# EAGLE board RGB_IR_J010131revC (EAGLE 7.7.0), part 1 of 5
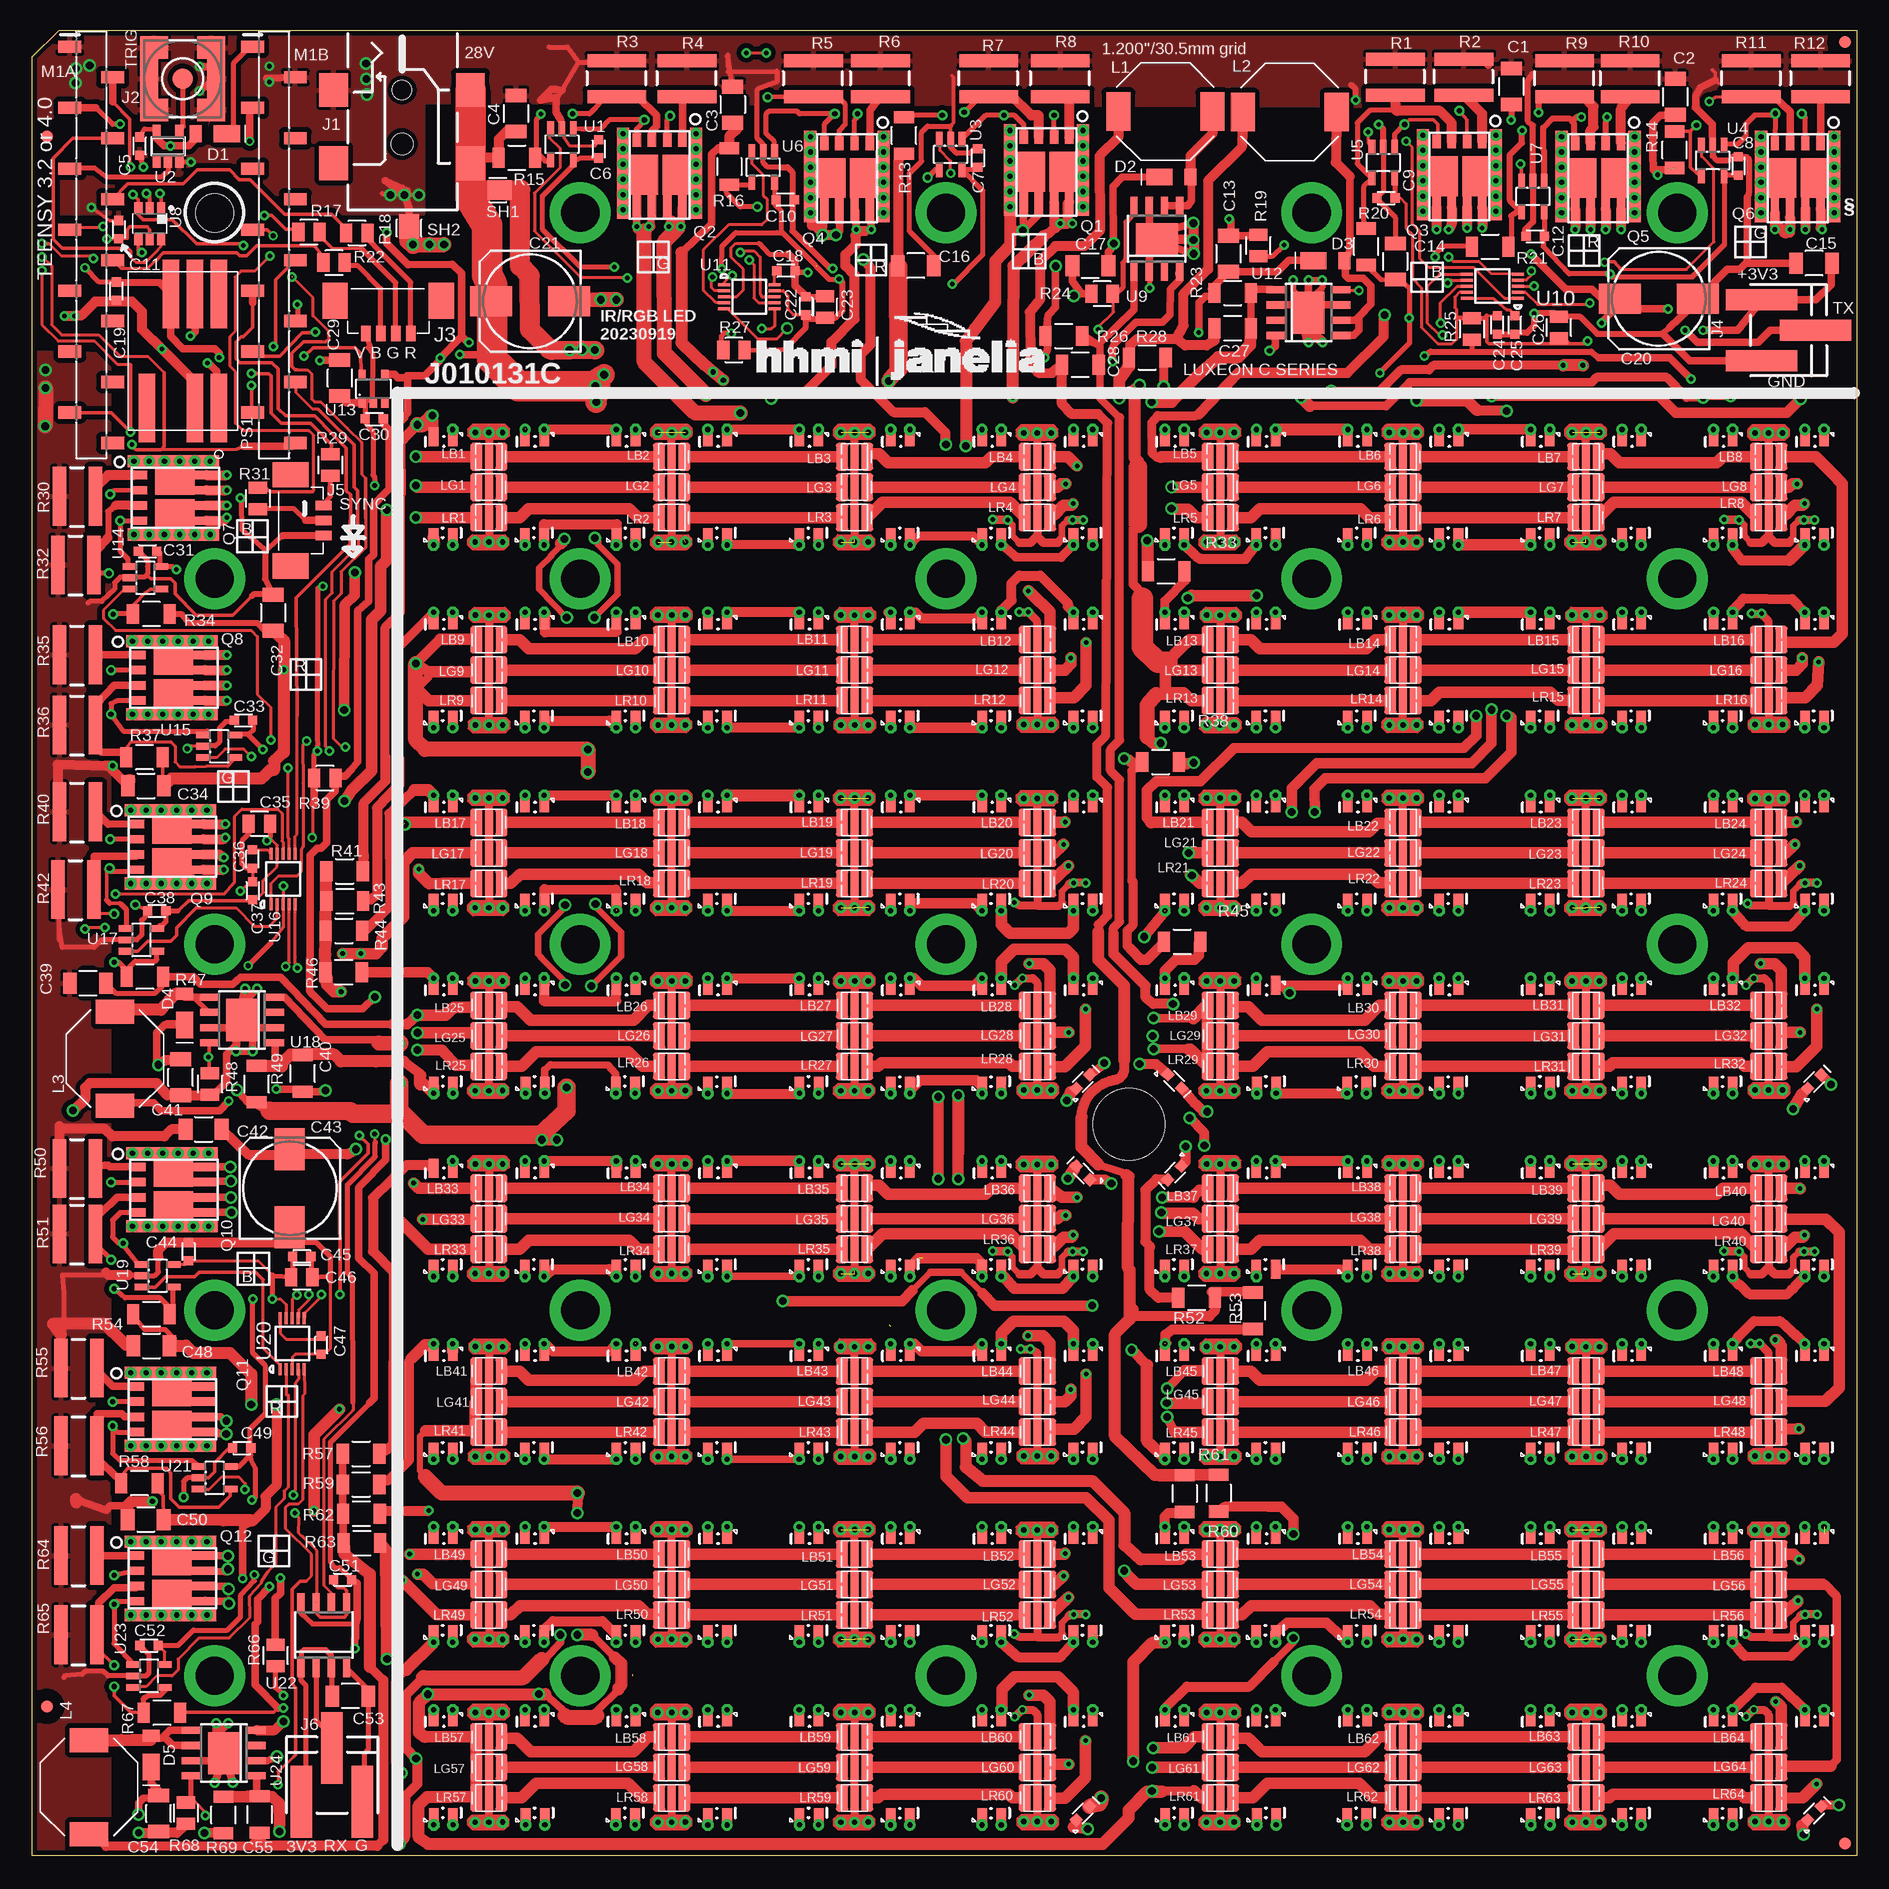
[diagram p0: board, top side]
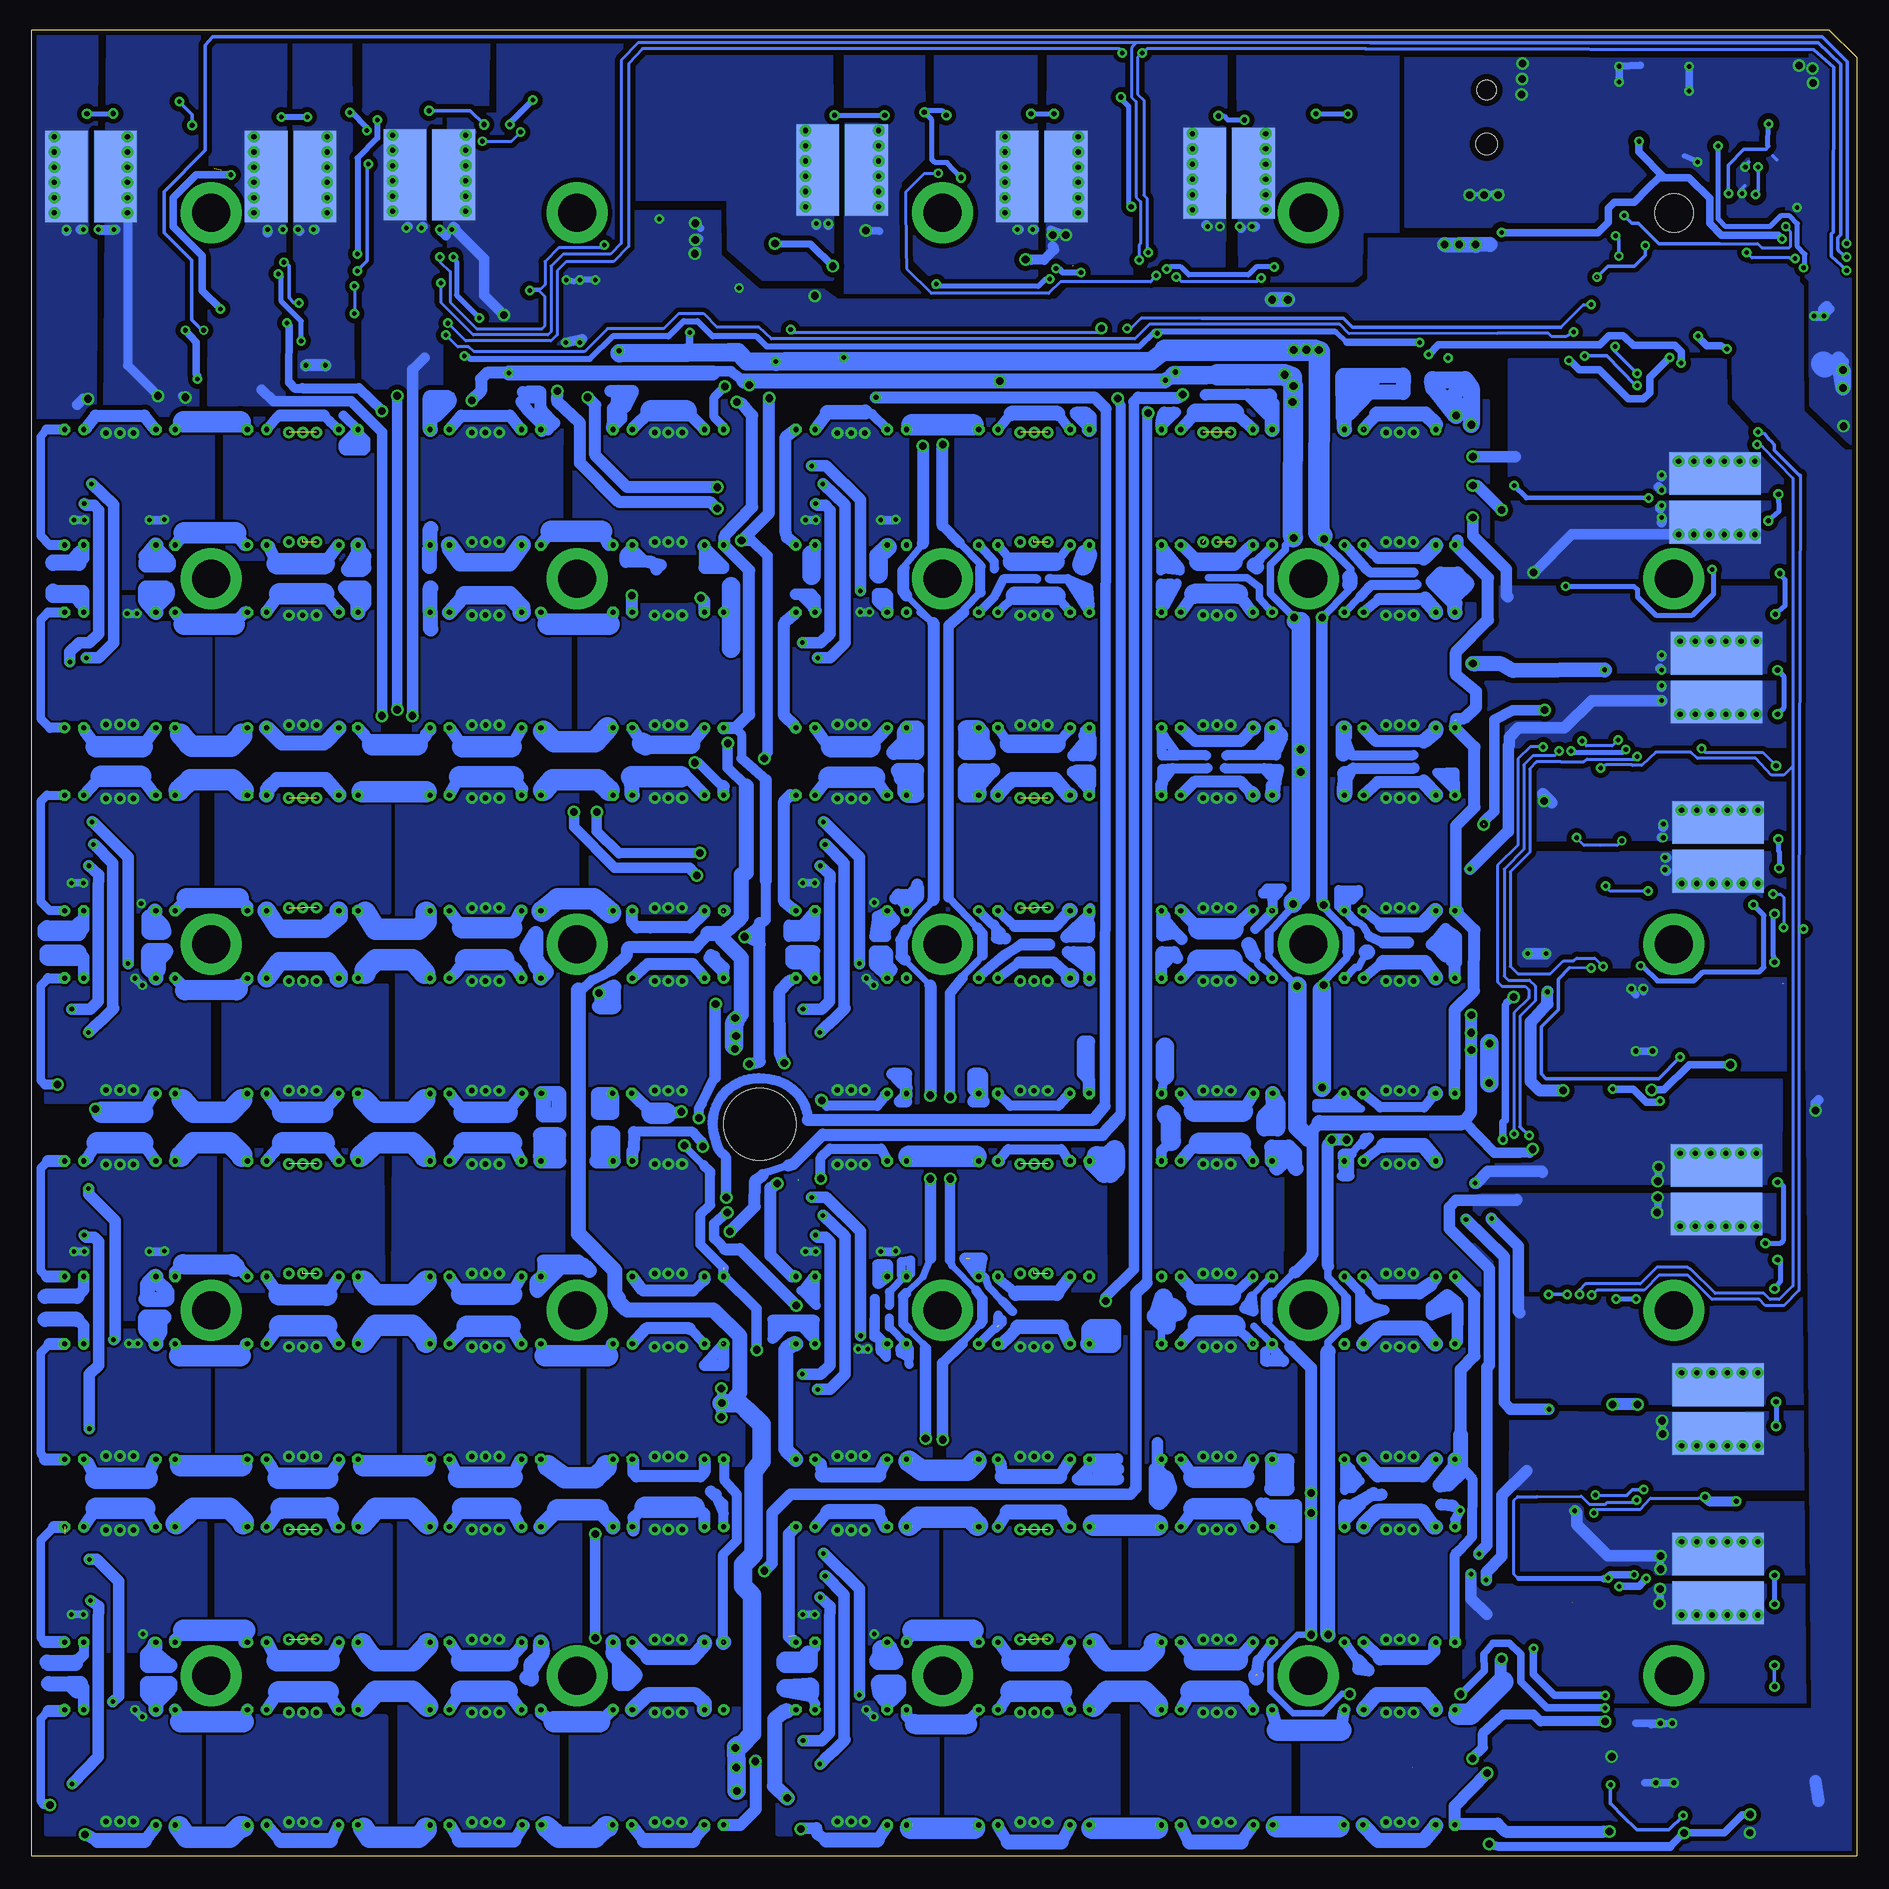
[diagram p1: board, bottom side, seen from below]

Size 152.15 x 152.15 mm. Coordinates in mm from the lower left corner, seen from the top.
Outline: 0,149.86 0,0 152.15,0 152.15,152.15 2.29,152.15 0,149.86
Copper layers (1*16): Top 0.068mm / dielectric 0.45mm / Bottom 0.068mm
Design rules "default *": minimum track width 8mil, minimum drill 12mil, track to track 8mil, track to pad 8mil, pad to pad 8mil, via to via 8mil, smd to smd 8mil, copper to edge 16mil, drill to drill 8mil, minimum pad ring 10mil, minimum via ring 8mil, stop-mask expansion 4mil, vias tented up to drill 25mil, thermal gap 10mil
Holes 5.99 mm at 91.44,60.96
Holes 3.17 mm at 15.24,136.91

## Footprints (pad centres in the part's own frame; a part is rotated, then mirrored left to right if it is on the bottom)
1210S = smd 1.14 x 1.75: 1 -1.5,0; 2 1.5,0
0603S = smd 0.762 x 0.762: 1 -0.762,0; 2 0.762,0
153CLV-0810 = smd 3.5 x 2.5: + 3.25,0; - -3.25,0
0805S = smd 1.016 x 1.524: 1 -0.889,0; 2 0.889,0
1206S = smd 1.016 x 1.651: 1 -1.524,0; 2 1.524,0
PWRDI-123 = smd 1 x 1.4: A 1.6,0 | smd 2.2 x 1.4: K -1,0
FIDUCIAL_1MM = smd 1 x 1: 1 0,0
LED_SFH4045_HEAT_A = smd 0.8 x 1.6: A -0.8,-0.4; C 0.8,-0.4 | drill 0.432 octagon: A1 -0.8,-1
LED_SFH4050_HEAT = smd 0.8 x 1.6: A -0.8,-0.4; C 0.8,-0.4 | drill 0.432 octagon: A1 -0.8,-1 | drill 0.432: C1 0.8,-1
LED_SFH4050_HEAT_C = smd 0.8 x 1.6: A -0.8,-0.4; C 0.8,-0.4 | drill 0.432: C1 0.8,-1
LED_SFH4050 = smd 0.8 x 0.8: A -0.8,0; C 0.8,0
PJ-002 = smd 2.8 x 2.4: 1A 5,5.7; 1B 11.1,5.7; 2 5,-5.7; 3 11.1,-5.7 | hole 1.6: 5,0 | hole 1.8: 9.5,0
SMA-SMD = smd 1.73 x 1.73: 1 0,0 | smd 2.35 x 1.9: 2@1 -2.375,2.6; 2@2 -2.375,-2.6; 2@3 2.375,-2.6; 2@4 2.375,2.6 | smd 1.5 x 3.4: 2@5 -2.8,0; 2@6 2.8,0
MOLEX_1.25-4 = smd 0.8 x 1.3: 1 -1.875,1.25; 2 -0.625,1.25; 3 0.625,1.25; 4 1.875,1.25 | smd 2.1 x 3: P$3 -4.425,-1.5; P$4 4.425,-1.5
TE-3-SM-V = smd 1.778 x 5.969: P$1 2.54,-2.235; P$2 0,2.235; P$3 -2.54,-2.235
MOLEX_1.25-3 = smd 0.8 x 1.3: 1 -1.25,1.875; 2 0,1.875; 3 1.25,1.875 | smd 2.1 x 3: P$3 -3.8,-0.875; P$4 3.8,-0.875
SRU8043 = smd 2.007 x 3.2: 1 -3.912,0; 2 3.912,0
SUNPLUS-LED = smd 1 x 2.286: GA -1.05,0; GC 1.05,0 | smd 0.69 x 2.286: T 0,0
SAMTEC_SSM-114-S-SV = smd 1.016 x 1.905: 1 0,0; 2 2.54,3.556; 3 5.08,0; 4 7.62,3.556; 5 10.16,0; 6 12.7,3.556; 7 15.24,0; 8 17.78,3.556; 9 20.32,0; 10 22.86,3.556; 11 25.4,0; 12 27.94,3.556; 13 30.48,0; 14 33.02,3.556
DC-DC-TDN-5W = smd 5.7 x 1.4: 1 4.75,3; 2 4.75,1; 4 4.75,-3; 5 -4.75,3; 6 -4.75,1; 7 -4.75,-1
LFPAK56_HS2 = smd 0.7 x 1.15: 1 -1.905,-3.275; 2 -0.635,-3.275; 3 0.635,-3.275; 4 1.905,-3.275 | smd 0.7 x 1.9: 5 1.905,2.225; 6 0.635,2.225; 7 -0.635,2.225; 8 -1.905,2.225 | drill 0.432: 5A 3.048,1.27; 5A1 3.048,2.54; 5B 3.048,0; 5C 3.048,-1.27; 5C1 3.048,-2.54; 5C2 3.048,-3.81; 8A -3.048,1.27; 8B -3.048,0; 8C -3.048,-1.27; 8C1 -3.048,-2.54; 8C2 -3.048,2.54; 8C3 -3.048,-3.81 | smd 2.286 x 3.302: 56 1.27,-0.381; 78 -1.397,-0.381 | smd 1.016 x 7.62: 56A 3.048,-0.508; 78A -3.048,-0.508 | smd 3.556 x 7.62 bottom: 56B 2.032,-0.508; 78B -2.032,-0.508
1812 = smd 4.9 x 1.1: 1 0,1.5; 2 0,-1.5
JUMPER = smd 1.016 x 1.651: 1 -0.635,0; 2 0.381,0
SOT23-5 = smd 0.55 x 1.2: 1 -0.95,-1.3; 2 0,-1.3; 3 0.95,-1.3; 4 0.95,1.3; 5 -0.95,1.3
SOT23-5' = smd 0.69 x 0.99: 1 -0.95,-1.29; 2 0,-1.29; 3 0.95,-1.29; 4 0.95,1.3; 5 -0.95,1.3
DBV_R-PDSO-G6 = smd 0.69 x 0.99: 1 -0.95,-1.29; 2 0,-1.29; 3 0.95,-1.29; 4 0.95,1.3; 5 0,1.3; 6 -0.95,1.3
SOIC8-EP = smd 0.6 x 1.5: 1 -1.905,-2.75; 2 -0.635,-2.75; 3 0.635,-2.75; 4 1.905,-2.75; 5 1.905,2.75; 6 0.635,2.75; 7 -0.635,2.75; 8 -1.905,2.75 | smd 3.502 x 2.613: EP 0,0
MSOP10 = smd 0.25 x 1: 1 -1,-2.113; 2 -0.5,-2.113; 3 0,-2.113; 4 0.5,-2.113; 5 1,-2.113; 6 1,2.113; 7 0.5,2.113; 8 0,2.113; 9 -0.5,2.113; 10 -1,2.113
SOT23-5'' = smd 0.6 x 0.9: 1 -0.95,-1.15; 2 0,-1.15; 3 0.95,-1.15; 4 0.95,1.15; 5 -0.95,1.15
SOIC8 = smd 0.6 x 1.5: 1 -1.905,-2.75; 2 -0.635,-2.75; 3 0.635,-2.75; 4 1.905,-2.75; 5 1.905,2.75; 6 0.635,2.75; 7 -0.635,2.75; 8 -1.905,2.75
SUNPLUS-VIAS-ONLY = drill 0.457: T1 -1.143,4.572; T2 0,4.572; T3 1.143,4.572; T4 1.143,-4.572 | drill 0.432: T5 0,-4.572; T6 -1.143,-4.572
SUNPLUS-TOP-VIAS-ONLY = drill 0.457: T1 -1.143,4.521; T2 0,4.521; T3 1.143,4.521

## Placement (x,y rotation side)
C1  10@50  [1210S]  123.32,147.45 90 top
C2  10@50  [1210S]  136.98,146.58 90 top
C3  10@50  [1210S]  58.42,145.92 90 top
C4  10@50  [1210S]  40.36,145.19 90 top
C5  0.1  [0603S]  8.99,142.47 270 top
C6  0.1  [0603S]  47.24,142.24 90 top
C7  0.1  [0603S]  78.84,141.48 90 top
C8  0.1  [0603S]  142.24,140.82 90 top
C9  0.1  [0603S]  112.88,138.15 180 top
C10  0.1  [0603S]  62.79,138 0 top
C11  0.1  [0603S]  7.24,135.51 90 top
C12  0.1  [0603S]  125.32,134.95 180 top
C13  10@50  [1210S]  99.75,133.5 90 top
C14  10@50  [1210S]  113.64,132.87 90 top
C15  10  [1210S]  148.56,132.72 0 top
C16  10@50  [1210S]  73.69,132.51 0 top
C17  10@50  [1210S]  88.24,132.51 180 top
C18  0.1  [0603S]  62.87,132.08 0 top
C19  0.1  [0603S]  7.06,130.38 270 top
C20  [153CLV-0810]  135.61,129.74 180 top
C21  [153CLV-0810]  41.53,129.54 180 top
C22  0.1  [0603S]  64.52,129.16 90 top
C23  4.7  [0805S]  66.12,129.06 90 top
C24  0.1  [0603S]  122.15,127.56 270 top
C25  0.1  [0603S]  123.62,127.56 270 top
C26  4.7  [0805S]  127.28,127.36 90 top
C27  2.2@50  [1206S]  100.1,127.3 180 top
C28  2.2@50  [1206S]  87.4,124.26 180 top
C29  10  [1210S]  25.68,123.14 270 top
C30  0.1  [0603S]  28.55,119.74 180 top
C31  0.1  [0603S]  9.65,108.71 180 top
C32  10@50  [1210S]  20.12,103.58 90 top
C33  0.1  [0603S]  17.65,94.61 180 top
C34  10@50  [1210S]  9.53,89.15 180 top
C35  4.7  [0805S]  18.97,86 180 top
C36  0.1  [0603S]  18.39,83.06 270 top
C37  0.1  [0603S]  18.41,80.42 90 top
C38  0.1  [0603S]  10.41,78.74 180 top
C39  10@50  [1210S]  4.67,72.72 180 top
C40  2.2@50  [1206S]  22.58,65.2 270 top
C41  10@50  [1210S]  12.4,64.87 270 top
C42  10@50  [1210S]  14.33,60.53 180 top
C43  [153CLV-0810]  21.51,55.63 90 top
C44  0.1  [0603S]  13.06,50.34 90 top
C45  0.1  [0603S]  22.5,49.94 0 top
C46  4.7  [0805S]  22.5,48.21 0 top
C47  0.1  [0603S]  24.13,42.55 270 top
C48  10@50  [1210S]  9.98,42.49 180 top
C49  0.1  [0603S]  17.5,33.99 180 top
C50  10@50  [1210S]  9.5,28.02 180 top
C51  0.1  [0603S]  25.91,23.01 180 top
C52  0.1  [0603S]  9.78,17.53 180 top
C53  10  [1210S]  26.54,13.31 0 top
C54  10@50  [1210S]  10.57,3.53 270 top
C55  2.2@50  [1206S]  19,3.43 270 top
D1  DLFS240L  [PWRDI-123]  15.27,143.51 180 top
D2  DLFS240L  [PWRDI-123]  95,139.9 0 top
D3  DLFS240L  [PWRDI-123]  107.82,132.92 0 top
D4  DLFS240L  [PWRDI-123]  12.75,70.23 90 top
D5  DLFS240L  [PWRDI-123]  9.96,8.38 90 top
FID1  FIDUCIAL  [FIDUCIAL_1MM]  151.13,151.13 0 top
FID2  FIDUCIAL  [FIDUCIAL_1MM]  1.27,143.26 0 top
FID3  FIDUCIAL  [FIDUCIAL_1MM]  1.27,12.45 0 top
FID4  FIDUCIAL  [FIDUCIAL_1MM]  151.13,1.02 0 top
IR1  SFH4050  [LED_SFH4045_HEAT_A]  34.29,117.86 180 top
IR2  SFH4050  [LED_SFH4050_HEAT]  41.91,117.86 180 top
IR3  SFH4050  [LED_SFH4050_HEAT]  49.53,117.86 180 top
IR4  SFH4050  [LED_SFH4050_HEAT]  57.15,117.86 180 top
IR5  SFH4050  [LED_SFH4050_HEAT]  64.77,117.86 180 top
IR6  SFH4050  [LED_SFH4050_HEAT]  72.39,117.86 180 top
IR7  SFH4050  [LED_SFH4050_HEAT]  80.01,117.86 180 top
IR8  SFH4050  [LED_SFH4050_HEAT]  87.63,117.86 180 top
IR9  SFH4050  [LED_SFH4050_HEAT]  95.25,117.86 180 top
IR10  SFH4050  [LED_SFH4050_HEAT]  102.87,117.86 180 top
IR11  SFH4050  [LED_SFH4050_HEAT]  110.49,117.86 180 top
IR12  SFH4050  [LED_SFH4050_HEAT]  118.11,117.86 180 top
IR13  SFH4050  [LED_SFH4050_HEAT]  125.73,117.86 180 top
IR14  SFH4050  [LED_SFH4050_HEAT]  133.35,117.86 180 top
IR15  SFH4050  [LED_SFH4050_HEAT]  140.97,117.86 180 top
IR16  SFH4050  [LED_SFH4050_HEAT]  148.59,117.86 180 top
IR17  SFH4050  [LED_SFH4050_HEAT]  34.29,110.24 0 top
IR18  SFH4050  [LED_SFH4050_HEAT]  41.91,110.24 0 top
IR19  SFH4050  [LED_SFH4050_HEAT]  49.53,110.24 0 top
IR20  SFH4050  [LED_SFH4050_HEAT]  57.15,110.24 0 top
IR21  SFH4050  [LED_SFH4050_HEAT]  64.77,110.24 0 top
IR22  SFH4050  [LED_SFH4050_HEAT]  72.39,110.24 0 top
IR23  SFH4050  [LED_SFH4050_HEAT]  80.01,110.24 0 top
IR24  SFH4050  [LED_SFH4050_HEAT]  87.63,110.24 0 top
IR25  SFH4050  [LED_SFH4050_HEAT]  95.25,110.24 0 top
IR26  SFH4050  [LED_SFH4050_HEAT]  102.87,110.24 0 top
IR27  SFH4050  [LED_SFH4050_HEAT]  110.49,110.24 0 top
IR28  SFH4050  [LED_SFH4050_HEAT]  118.11,110.24 0 top
IR29  SFH4050  [LED_SFH4050_HEAT]  125.73,110.24 0 top
IR30  SFH4050  [LED_SFH4050_HEAT]  133.35,110.24 0 top
IR31  SFH4050  [LED_SFH4050_HEAT]  140.97,110.24 0 top
IR32  SFH4050  [LED_SFH4050_HEAT]  148.59,110.24 0 top
IR33  SFH4050  [LED_SFH4050_HEAT]  34.29,102.62 180 top
IR34  SFH4050  [LED_SFH4050_HEAT]  41.91,102.62 180 top
IR35  SFH4050  [LED_SFH4050_HEAT]  49.53,102.62 180 top
IR36  SFH4050  [LED_SFH4050_HEAT]  57.15,102.62 180 top
IR37  SFH4050  [LED_SFH4050_HEAT]  64.77,102.62 180 top
IR38  SFH4050  [LED_SFH4050_HEAT]  72.39,102.62 180 top
IR39  SFH4050  [LED_SFH4050_HEAT]  80.01,102.62 180 top
IR40  SFH4050  [LED_SFH4050_HEAT]  87.63,102.62 180 top
IR41  SFH4050  [LED_SFH4050_HEAT]  95.25,102.62 180 top
IR42  SFH4050  [LED_SFH4050_HEAT]  102.87,102.62 180 top
IR43  SFH4050  [LED_SFH4050_HEAT]  110.49,102.62 180 top
IR44  SFH4050  [LED_SFH4050_HEAT]  118.11,102.62 180 top
IR45  SFH4050  [LED_SFH4050_HEAT]  125.73,102.62 180 top
IR46  SFH4050  [LED_SFH4050_HEAT]  133.35,102.62 180 top
IR47  SFH4050  [LED_SFH4050_HEAT]  140.97,102.62 180 top
IR48  SFH4050  [LED_SFH4050_HEAT]  148.59,102.62 180 top
IR49  SFH4050  [LED_SFH4050_HEAT]  34.29,95 0 top
IR50  SFH4050  [LED_SFH4050_HEAT]  41.91,95 0 top
IR51  SFH4050  [LED_SFH4050_HEAT]  49.53,95 0 top
IR52  SFH4050  [LED_SFH4050_HEAT]  57.15,95 0 top
IR53  SFH4050  [LED_SFH4050_HEAT]  64.77,95 0 top
IR54  SFH4050  [LED_SFH4050_HEAT]  72.39,95 0 top
IR55  SFH4050  [LED_SFH4050_HEAT]  80.01,95 0 top
IR56  SFH4050  [LED_SFH4050_HEAT]  87.63,95 0 top
IR57  SFH4050  [LED_SFH4050_HEAT]  95.25,95 0 top
IR58  SFH4050  [LED_SFH4050_HEAT]  102.87,95 0 top
IR59  SFH4050  [LED_SFH4050_HEAT]  110.49,95 0 top
IR60  SFH4050  [LED_SFH4050_HEAT]  118.11,95 0 top
IR61  SFH4050  [LED_SFH4050_HEAT]  125.73,95 0 top
IR62  SFH4050  [LED_SFH4050_HEAT]  133.35,95 0 top
IR63  SFH4050  [LED_SFH4050_HEAT]  140.97,95 0 top
IR64  SFH4050  [LED_SFH4050_HEAT]  148.59,95 0 top
IR65  SFH4050  [LED_SFH4050_HEAT]  34.29,87.38 180 top
IR66  SFH4050  [LED_SFH4050_HEAT]  41.91,87.38 180 top
IR67  SFH4050  [LED_SFH4050_HEAT]  49.53,87.38 180 top
IR68  SFH4050  [LED_SFH4050_HEAT]  57.15,87.38 180 top
IR69  SFH4050  [LED_SFH4050_HEAT]  64.77,87.38 180 top
IR70  SFH4050  [LED_SFH4050_HEAT]  72.39,87.38 180 top
IR71  SFH4050  [LED_SFH4050_HEAT]  80.01,87.38 180 top
IR72  SFH4050  [LED_SFH4050_HEAT]  87.63,87.38 180 top
IR73  SFH4050  [LED_SFH4050_HEAT]  95.25,87.38 180 top
IR74  SFH4050  [LED_SFH4050_HEAT]  102.87,87.38 180 top
IR75  SFH4050  [LED_SFH4050_HEAT]  110.49,87.38 180 top
IR76  SFH4050  [LED_SFH4050_HEAT]  118.11,87.38 180 top
IR77  SFH4050  [LED_SFH4050_HEAT]  125.73,87.38 180 top
IR78  SFH4050  [LED_SFH4050_HEAT]  133.35,87.38 180 top
IR79  SFH4050  [LED_SFH4050_HEAT]  140.97,87.38 180 top
IR80  SFH4050  [LED_SFH4050_HEAT]  148.59,87.38 180 top
IR81  SFH4050  [LED_SFH4050_HEAT]  34.29,79.76 0 top
IR82  SFH4050  [LED_SFH4050_HEAT]  41.91,79.76 0 top
IR83  SFH4050  [LED_SFH4050_HEAT]  49.53,79.76 0 top
IR84  SFH4050  [LED_SFH4050_HEAT]  57.15,79.76 0 top
IR85  SFH4050  [LED_SFH4050_HEAT]  64.77,79.76 0 top
IR86  SFH4050  [LED_SFH4050_HEAT]  72.39,79.76 0 top
IR87  SFH4050  [LED_SFH4050_HEAT]  80.01,79.76 0 top
IR88  SFH4050  [LED_SFH4050_HEAT]  87.63,79.76 0 top
IR89  SFH4050  [LED_SFH4050_HEAT]  95.25,79.76 0 top
IR90  SFH4050  [LED_SFH4050_HEAT]  102.87,79.76 0 top
IR91  SFH4050  [LED_SFH4050_HEAT]  110.49,79.76 0 top
IR92  SFH4050  [LED_SFH4050_HEAT]  118.11,79.76 0 top
IR93  SFH4050  [LED_SFH4050_HEAT]  125.73,79.76 0 top
IR94  SFH4050  [LED_SFH4050_HEAT]  133.35,79.76 0 top
IR95  SFH4050  [LED_SFH4050_HEAT]  140.97,79.76 0 top
IR96  SFH4050  [LED_SFH4050_HEAT]  148.59,79.76 0 top
IR97  SFH4050  [LED_SFH4050_HEAT]  34.29,72.14 180 top
IR98  SFH4050  [LED_SFH4050_HEAT]  41.91,72.14 180 top
IR99  SFH4050  [LED_SFH4050_HEAT]  49.53,72.14 180 top
IR100  SFH4050  [LED_SFH4050_HEAT]  57.15,72.14 180 top
IR101  SFH4050  [LED_SFH4050_HEAT]  64.77,72.14 180 top
IR102  SFH4050  [LED_SFH4050_HEAT]  72.39,72.14 180 top
IR103  SFH4050  [LED_SFH4050_HEAT]  80.01,72.14 180 top
IR104  SFH4050  [LED_SFH4050_HEAT]  87.63,72.14 180 top
IR105  SFH4050  [LED_SFH4050_HEAT]  95.25,72.14 180 top
IR106  SFH4050  [LED_SFH4050_HEAT_C]  102.87,72.14 180 top
IR107  SFH4050  [LED_SFH4050_HEAT]  110.49,72.14 180 top
IR108  SFH4050  [LED_SFH4050_HEAT]  118.11,72.14 180 top
IR109  SFH4050  [LED_SFH4050_HEAT]  125.73,72.14 180 top
IR110  SFH4050  [LED_SFH4050_HEAT]  133.35,72.14 180 top
IR111  SFH4050  [LED_SFH4050_HEAT]  140.97,72.14 180 top
IR112  SFH4050  [LED_SFH4050_HEAT]  148.59,72.14 180 top
IR113  SFH4050  [LED_SFH4050_HEAT]  34.31,64.53 0 top
IR114  SFH4050  [LED_SFH4050_HEAT]  41.96,64.53 0 top
IR115  SFH4050  [LED_SFH4050_HEAT]  49.48,64.53 0 top
IR116  SFH4050  [LED_SFH4050_HEAT]  64.79,64.53 0 top
IR117  SFH4050  [LED_SFH4050]  95.27,64.53 315 top
IR118  SFH4050  [LED_SFH4050_HEAT]  102.92,64.53 0 top
IR119  SFH4050  [LED_SFH4050_HEAT]  110.44,64.53 0 top
IR120  SFH4050  [LED_SFH4050_HEAT]  125.75,64.53 0 top
IR121  SFH4050  [LED_SFH4050_HEAT]  57.15,64.52 0 top
IR122  SFH4050  [LED_SFH4050_HEAT]  72.39,64.52 0 top
IR123  SFH4050  [LED_SFH4050_HEAT]  80.01,64.52 0 top
IR124  SFH4050  [LED_SFH4050]  87.63,64.52 45 top
IR125  SFH4050  [LED_SFH4050_HEAT]  118.11,64.52 0 top
IR126  SFH4050  [LED_SFH4050_HEAT]  133.35,64.52 0 top
IR127  SFH4050  [LED_SFH4050_HEAT]  140.97,64.52 0 top
IR128  SFH4050  [LED_SFH4050]  148.59,64.52 45 top
IR129  SFH4050  [LED_SFH4045_HEAT_A]  34.29,56.9 180 top
IR130  SFH4050  [LED_SFH4050_HEAT]  41.91,56.9 180 top
IR131  SFH4050  [LED_SFH4050_HEAT]  49.53,56.9 180 top
IR132  SFH4050  [LED_SFH4050_HEAT]  57.15,56.9 180 top
IR133  SFH4050  [LED_SFH4050_HEAT]  64.77,56.9 180 top
IR134  SFH4050  [LED_SFH4050_HEAT]  72.39,56.9 180 top
IR135  SFH4050  [LED_SFH4050_HEAT]  80.01,56.9 180 top
IR136  SFH4050  [LED_SFH4050]  87.63,56.9 135 top
IR137  SFH4050  [LED_SFH4050]  95.25,56.9 225 top
IR138  SFH4050  [LED_SFH4050_HEAT]  102.87,56.9 180 top
IR139  SFH4050  [LED_SFH4050_HEAT]  110.49,56.9 180 top
IR140  SFH4050  [LED_SFH4050_HEAT]  118.11,56.9 180 top
IR141  SFH4050  [LED_SFH4050_HEAT]  125.73,56.9 180 top
IR142  SFH4050  [LED_SFH4050_HEAT]  133.35,56.9 180 top
IR143  SFH4050  [LED_SFH4050_HEAT]  140.97,56.9 180 top
IR144  SFH4050  [LED_SFH4050_HEAT]  148.59,56.9 180 top
IR145  SFH4050  [LED_SFH4050_HEAT]  34.29,49.28 0 top
IR146  SFH4050  [LED_SFH4050_HEAT]  41.91,49.28 0 top
IR147  SFH4050  [LED_SFH4050_HEAT]  49.53,49.28 0 top
IR148  SFH4050  [LED_SFH4050_HEAT]  57.15,49.28 0 top
IR149  SFH4050  [LED_SFH4050_HEAT]  64.77,49.28 0 top
IR150  SFH4050  [LED_SFH4050_HEAT]  72.39,49.28 0 top
IR151  SFH4050  [LED_SFH4050_HEAT]  80.01,49.28 0 top
IR152  SFH4050  [LED_SFH4050_HEAT]  87.63,49.28 0 top
IR153  SFH4050  [LED_SFH4050_HEAT]  95.25,49.28 0 top
IR154  SFH4050  [LED_SFH4045_HEAT_A]  102.87,49.28 0 top
IR155  SFH4050  [LED_SFH4050_HEAT]  110.49,49.28 0 top
IR156  SFH4050  [LED_SFH4050_HEAT]  118.11,49.28 0 top
IR157  SFH4050  [LED_SFH4050_HEAT]  125.73,49.28 0 top
IR158  SFH4050  [LED_SFH4050_HEAT]  133.35,49.28 0 top
IR159  SFH4050  [LED_SFH4050_HEAT]  140.97,49.28 0 top
IR160  SFH4050  [LED_SFH4050_HEAT]  148.59,49.28 0 top
IR161  SFH4050  [LED_SFH4050_HEAT]  34.29,41.66 180 top
IR162  SFH4050  [LED_SFH4050_HEAT]  41.91,41.66 180 top
IR163  SFH4050  [LED_SFH4050_HEAT]  49.53,41.66 180 top
IR164  SFH4050  [LED_SFH4050_HEAT]  57.15,41.66 180 top
IR165  SFH4050  [LED_SFH4050_HEAT]  64.77,41.66 180 top
IR166  SFH4050  [LED_SFH4050_HEAT]  72.39,41.66 180 top
IR167  SFH4050  [LED_SFH4050_HEAT]  80.01,41.66 180 top
IR168  SFH4050  [LED_SFH4050_HEAT]  87.63,41.66 180 top
IR169  SFH4050  [LED_SFH4050_HEAT]  95.25,41.66 180 top
IR170  SFH4050  [LED_SFH4050_HEAT]  102.87,41.66 180 top
IR171  SFH4050  [LED_SFH4050_HEAT]  110.49,41.66 180 top
IR172  SFH4050  [LED_SFH4050_HEAT]  118.11,41.66 180 top
IR173  SFH4050  [LED_SFH4050_HEAT]  125.73,41.66 180 top
IR174  SFH4050  [LED_SFH4050_HEAT]  133.35,41.66 180 top
IR175  SFH4050  [LED_SFH4050_HEAT]  140.97,41.66 180 top
IR176  SFH4050  [LED_SFH4050_HEAT]  148.59,41.66 180 top
IR177  SFH4050  [LED_SFH4050_HEAT]  34.29,34.04 0 top
IR178  SFH4050  [LED_SFH4050_HEAT]  41.91,34.04 0 top
IR179  SFH4050  [LED_SFH4050_HEAT]  49.53,34.04 0 top
IR180  SFH4050  [LED_SFH4050_HEAT]  57.15,34.04 0 top
IR181  SFH4050  [LED_SFH4050_HEAT]  64.77,34.04 0 top
IR182  SFH4050  [LED_SFH4050_HEAT]  72.39,34.04 0 top
IR183  SFH4050  [LED_SFH4050_HEAT]  80.01,34.04 0 top
IR184  SFH4050  [LED_SFH4050_HEAT]  87.63,34.04 0 top
IR185  SFH4050  [LED_SFH4050_HEAT]  95.25,34.04 0 top
IR186  SFH4050  [LED_SFH4050_HEAT]  102.87,34.04 0 top
IR187  SFH4050  [LED_SFH4050_HEAT]  110.49,34.04 0 top
IR188  SFH4050  [LED_SFH4050_HEAT]  118.11,34.04 0 top
IR189  SFH4050  [LED_SFH4050_HEAT]  125.73,34.04 0 top
IR190  SFH4050  [LED_SFH4050_HEAT]  133.35,34.04 0 top
IR191  SFH4050  [LED_SFH4050_HEAT]  140.97,34.04 0 top
IR192  SFH4050  [LED_SFH4050_HEAT]  148.59,34.04 0 top
IR193  SFH4050  [LED_SFH4050_HEAT]  34.29,26.42 180 top
IR194  SFH4050  [LED_SFH4050_HEAT]  41.91,26.42 180 top
IR195  SFH4050  [LED_SFH4050_HEAT]  49.53,26.42 180 top
IR196  SFH4050  [LED_SFH4050_HEAT]  57.15,26.42 180 top
IR197  SFH4050  [LED_SFH4050_HEAT]  64.77,26.42 180 top
IR198  SFH4050  [LED_SFH4050_HEAT]  72.39,26.42 180 top
IR199  SFH4050  [LED_SFH4050_HEAT]  80.01,26.42 180 top
IR200  SFH4050  [LED_SFH4050_HEAT]  87.63,26.42 180 top
IR201  SFH4050  [LED_SFH4050_HEAT]  95.25,26.42 180 top
IR202  SFH4050  [LED_SFH4050_HEAT]  102.87,26.42 180 top
IR203  SFH4050  [LED_SFH4050_HEAT]  110.49,26.42 180 top
IR204  SFH4050  [LED_SFH4050_HEAT]  118.11,26.42 180 top
IR205  SFH4050  [LED_SFH4050_HEAT]  125.73,26.42 180 top
IR206  SFH4050  [LED_SFH4050_HEAT]  133.35,26.42 180 top
IR207  SFH4050  [LED_SFH4050_HEAT]  140.97,26.42 180 top
IR208  SFH4050  [LED_SFH4050_HEAT]  148.59,26.42 180 top
IR209  SFH4050  [LED_SFH4050_HEAT]  34.29,18.8 0 top
IR210  SFH4050  [LED_SFH4050_HEAT]  41.91,18.8 0 top
IR211  SFH4050  [LED_SFH4050_HEAT]  49.53,18.8 0 top
IR212  SFH4050  [LED_SFH4050_HEAT]  57.15,18.8 0 top
IR213  SFH4050  [LED_SFH4050_HEAT]  64.77,18.8 0 top
IR214  SFH4050  [LED_SFH4050_HEAT]  72.39,18.8 0 top
IR215  SFH4050  [LED_SFH4050_HEAT]  80.01,18.8 0 top
IR216  SFH4050  [LED_SFH4050_HEAT]  87.63,18.8 0 top
IR217  SFH4050  [LED_SFH4050_HEAT]  95.25,18.8 0 top
IR218  SFH4050  [LED_SFH4050_HEAT]  102.87,18.8 0 top
IR219  SFH4050  [LED_SFH4050_HEAT]  110.49,18.8 0 top
IR220  SFH4050  [LED_SFH4050_HEAT]  118.11,18.8 0 top
IR221  SFH4050  [LED_SFH4050_HEAT]  125.73,18.8 0 top
IR222  SFH4050  [LED_SFH4050_HEAT]  133.35,18.8 0 top
IR223  SFH4050  [LED_SFH4050_HEAT]  140.97,18.8 0 top
IR224  SFH4050  [LED_SFH4050_HEAT]  148.59,18.8 0 top
IR225  SFH4050  [LED_SFH4050_HEAT]  34.29,11.18 180 top
IR226  SFH4050  [LED_SFH4050_HEAT]  41.91,11.18 180 top
IR227  SFH4050  [LED_SFH4050_HEAT]  49.53,11.18 180 top
IR228  SFH4050  [LED_SFH4050_HEAT]  57.15,11.18 180 top
IR229  SFH4050  [LED_SFH4050_HEAT]  64.77,11.18 180 top
IR230  SFH4050  [LED_SFH4050_HEAT]  72.39,11.18 180 top
IR231  SFH4050  [LED_SFH4050_HEAT]  80.01,11.18 180 top
IR232  SFH4050  [LED_SFH4050_HEAT]  87.63,11.18 180 top
IR233  SFH4050  [LED_SFH4050_HEAT]  95.25,11.18 180 top
IR234  SFH4050  [LED_SFH4050_HEAT]  102.87,11.18 180 top
IR235  SFH4050  [LED_SFH4050_HEAT]  110.49,11.18 180 top
IR236  SFH4050  [LED_SFH4050_HEAT]  118.11,11.18 180 top
IR237  SFH4050  [LED_SFH4050_HEAT]  125.73,11.18 180 top
IR238  SFH4050  [LED_SFH4050_HEAT]  133.35,11.18 180 top
IR239  SFH4050  [LED_SFH4050_HEAT]  140.97,11.18 180 top
IR240  SFH4050  [LED_SFH4050_HEAT]  148.59,11.18 180 top
IR241  SFH4050  [LED_SFH4050_HEAT]  34.31,3.57 0 top
IR242  SFH4050  [LED_SFH4050_HEAT]  41.96,3.57 0 top
IR243  SFH4050  [LED_SFH4050_HEAT]  49.48,3.57 0 top
IR244  SFH4050  [LED_SFH4050_HEAT]  64.79,3.57 0 top
IR245  SFH4050  [LED_SFH4050_HEAT]  95.27,3.57 0 top
IR246  SFH4050  [LED_SFH4050_HEAT]  102.92,3.57 0 top
IR247  SFH4050  [LED_SFH4050_HEAT]  110.44,3.57 0 top
IR248  SFH4050  [LED_SFH4050_HEAT]  125.75,3.57 0 top
IR249  SFH4050  [LED_SFH4050_HEAT]  57.15,3.56 0 top
IR250  SFH4050  [LED_SFH4050_HEAT]  72.39,3.56 0 top
IR251  SFH4050  [LED_SFH4050_HEAT]  80.01,3.56 0 top
IR252  SFH4050  [LED_SFH4050]  87.63,3.56 45 top
IR253  SFH4050  [LED_SFH4050_HEAT]  118.11,3.56 0 top
IR254  SFH4050  [LED_SFH4050_HEAT]  133.35,3.56 0 top
IR255  SFH4050  [LED_SFH4050_HEAT]  140.97,3.56 0 top
IR256  SFH4050  [LED_SFH4050]  148.59,3.56 45 top
J1  [PJ-002]  30.86,152.15 270 top
J2  SMA-SMD  [SMA-SMD]  12.57,148.08 0 top
J3  [MOLEX_1.25-4]  29.72,128.09 180 top
J4  [TE-3-SM-V]  146.43,127.13 270 top
J5  [MOLEX_1.25-3]  22.45,111.28 270 top
J6  [TE-3-SM-V]  25.02,6.73 0 top
L1  68uH/1A  [SRU8043]  94.49,145.34 0 top
L2  68uH/1A  [SRU8043]  104.85,145.31 0 top
L3  68uH/1A  [SRU8043]  6.93,66.42 90 top
L4  68uH/1A  [SRU8043]  4.78,5.71 90 top
LB1  LED-B  [SUNPLUS-LED]  38.1,116.59 180 top
LB2  LED-B  [SUNPLUS-LED]  53.34,116.59 180 top
LB3  LED-B  [SUNPLUS-LED]  68.58,116.59 180 top
LB4  LED-B  [SUNPLUS-LED]  83.82,116.59 180 top
LB5  LED-B  [SUNPLUS-LED]  99.06,116.59 180 top
LB6  LED-B  [SUNPLUS-LED]  114.3,116.59 180 top
LB7  LED-B  [SUNPLUS-LED]  129.54,116.59 180 top
LB8  LED-B  [SUNPLUS-LED]  144.78,116.59 180 top
LB9  LED-B  [SUNPLUS-LED]  38.1,101.35 0 top
LB10  LED-B  [SUNPLUS-LED]  53.34,101.35 0 top
LB11  LED-B  [SUNPLUS-LED]  68.58,101.35 0 top
LB12  LED-B  [SUNPLUS-LED]  83.82,101.35 0 top
LB13  LED-B  [SUNPLUS-LED]  99.06,101.35 0 top
LB14  LED-B  [SUNPLUS-LED]  114.3,101.35 0 top
LB15  LED-B  [SUNPLUS-LED]  129.54,101.35 0 top
LB16  LED-B  [SUNPLUS-LED]  144.78,101.35 0 top
LB17  LED-B  [SUNPLUS-LED]  38.1,86.11 180 top
LB18  LED-B  [SUNPLUS-LED]  53.34,86.11 180 top
LB19  LED-B  [SUNPLUS-LED]  68.58,86.11 180 top
LB20  LED-B  [SUNPLUS-LED]  83.82,86.11 180 top
LB21  LED-B  [SUNPLUS-LED]  99.06,86.11 180 top
LB22  LED-B  [SUNPLUS-LED]  114.3,86.11 180 top
LB23  LED-B  [SUNPLUS-LED]  129.54,86.11 180 top
LB24  LED-B  [SUNPLUS-LED]  144.78,86.11 180 top
LB25  LED-B  [SUNPLUS-LED]  38.1,70.87 0 top
LB26  LED-B  [SUNPLUS-LED]  53.34,70.87 0 top
LB27  LED-B  [SUNPLUS-LED]  68.58,70.87 0 top
LB28  LED-B  [SUNPLUS-LED]  83.82,70.87 0 top
LB29  LED-B  [SUNPLUS-LED]  99.06,70.87 0 top
LB30  LED-B  [SUNPLUS-LED]  114.3,70.87 0 top
LB31  LED-B  [SUNPLUS-LED]  129.54,70.87 0 top
LB32  LED-B  [SUNPLUS-LED]  144.78,70.87 0 top
LB33  LED-B  [SUNPLUS-LED]  38.1,55.63 180 top
LB34  LED-B  [SUNPLUS-LED]  53.34,55.63 180 top
LB35  LED-B  [SUNPLUS-LED]  68.58,55.63 180 top
LB36  LED-B  [SUNPLUS-LED]  83.82,55.63 180 top
LB37  LED-B  [SUNPLUS-LED]  99.06,55.63 180 top
LB38  LED-B  [SUNPLUS-LED]  114.3,55.63 180 top
LB39  LED-B  [SUNPLUS-LED]  129.54,55.63 180 top
LB40  LED-B  [SUNPLUS-LED]  144.78,55.63 180 top
LB41  LED-B  [SUNPLUS-LED]  38.1,40.39 0 top
LB42  LED-B  [SUNPLUS-LED]  53.34,40.39 0 top
LB43  LED-B  [SUNPLUS-LED]  68.58,40.39 0 top
LB44  LED-B  [SUNPLUS-LED]  83.82,40.39 0 top
LB45  LED-B  [SUNPLUS-LED]  99.06,40.39 0 top
LB46  LED-B  [SUNPLUS-LED]  114.3,40.39 0 top
LB47  LED-B  [SUNPLUS-LED]  129.54,40.39 0 top
LB48  LED-B  [SUNPLUS-LED]  144.78,40.39 0 top
LB49  LED-B  [SUNPLUS-LED]  38.1,25.15 180 top
LB50  LED-B  [SUNPLUS-LED]  53.34,25.15 180 top
LB51  LED-B  [SUNPLUS-LED]  68.58,25.15 180 top
LB52  LED-B  [SUNPLUS-LED]  83.82,25.15 180 top
LB53  LED-B  [SUNPLUS-LED]  99.06,25.15 180 top
LB54  LED-B  [SUNPLUS-LED]  114.3,25.15 180 top
LB55  LED-B  [SUNPLUS-LED]  129.54,25.15 180 top
LB56  LED-B  [SUNPLUS-LED]  144.78,25.15 180 top
LB57  LED-B  [SUNPLUS-LED]  38.1,9.91 0 top
LB58  LED-B  [SUNPLUS-LED]  53.34,9.91 0 top
LB59  LED-B  [SUNPLUS-LED]  68.58,9.91 0 top
LB60  LED-B  [SUNPLUS-LED]  83.82,9.91 0 top
LB61  LED-B  [SUNPLUS-LED]  99.06,9.91 0 top
LB62  LED-B  [SUNPLUS-LED]  114.3,9.91 0 top
LB63  LED-B  [SUNPLUS-LED]  129.54,9.91 0 top
LB64  LED-B  [SUNPLUS-LED]  144.78,9.91 0 top
LG1  LED-G  [SUNPLUS-LED]  38.1,114.05 180 top
LG2  LED-G  [SUNPLUS-LED]  53.34,114.05 180 top
LG3  LED-G  [SUNPLUS-LED]  68.58,114.05 180 top
LG4  LED-G  [SUNPLUS-LED]  83.82,114.05 180 top
LG5  LED-G  [SUNPLUS-LED]  99.06,114.05 180 top
LG6  LED-G  [SUNPLUS-LED]  114.3,114.05 180 top
LG7  LED-G  [SUNPLUS-LED]  129.54,114.05 180 top
LG8  LED-G  [SUNPLUS-LED]  144.78,114.05 180 top
LG9  LED-G  [SUNPLUS-LED]  38.1,98.81 0 top
LG10  LED-G  [SUNPLUS-LED]  53.34,98.81 0 top
LG11  LED-G  [SUNPLUS-LED]  68.58,98.81 0 top
LG12  LED-G  [SUNPLUS-LED]  83.82,98.81 0 top
LG13  LED-G  [SUNPLUS-LED]  99.06,98.81 0 top
LG14  LED-G  [SUNPLUS-LED]  114.3,98.81 0 top
LG15  LED-G  [SUNPLUS-LED]  129.54,98.81 0 top
LG16  LED-G  [SUNPLUS-LED]  144.78,98.81 0 top
LG17  LED-G  [SUNPLUS-LED]  38.1,83.57 180 top
LG18  LED-G  [SUNPLUS-LED]  53.34,83.57 180 top
LG19  LED-G  [SUNPLUS-LED]  68.58,83.57 180 top
LG20  LED-G  [SUNPLUS-LED]  83.82,83.57 180 top
LG21  LED-G  [SUNPLUS-LED]  99.06,83.57 180 top
LG22  LED-G  [SUNPLUS-LED]  114.3,83.57 180 top
LG23  LED-G  [SUNPLUS-LED]  129.54,83.57 180 top
LG24  LED-G  [SUNPLUS-LED]  144.78,83.57 180 top
LG25  LED-G  [SUNPLUS-LED]  38.1,68.33 0 top
LG26  LED-G  [SUNPLUS-LED]  53.34,68.33 0 top
LG27  LED-G  [SUNPLUS-LED]  68.58,68.33 0 top
LG28  LED-G  [SUNPLUS-LED]  83.82,68.33 0 top
LG29  LED-G  [SUNPLUS-LED]  99.06,68.33 0 top
LG30  LED-G  [SUNPLUS-LED]  114.3,68.33 0 top
LG31  LED-G  [SUNPLUS-LED]  129.54,68.33 0 top
LG32  LED-G  [SUNPLUS-LED]  144.78,68.33 0 top
LG33  LED-G  [SUNPLUS-LED]  38.1,53.09 180 top
LG34  LED-G  [SUNPLUS-LED]  53.34,53.09 180 top
LG35  LED-G  [SUNPLUS-LED]  68.58,53.09 180 top
LG36  LED-G  [SUNPLUS-LED]  83.82,53.09 180 top
LG37  LED-G  [SUNPLUS-LED]  99.06,53.09 180 top
LG38  LED-G  [SUNPLUS-LED]  114.3,53.09 180 top
LG39  LED-G  [SUNPLUS-LED]  129.54,53.09 180 top
LG40  LED-G  [SUNPLUS-LED]  144.78,53.09 180 top
LG41  LED-G  [SUNPLUS-LED]  38.1,37.85 0 top
LG42  LED-G  [SUNPLUS-LED]  53.34,37.85 0 top
LG43  LED-G  [SUNPLUS-LED]  68.58,37.85 0 top
LG44  LED-G  [SUNPLUS-LED]  83.82,37.85 0 top
LG45  LED-G  [SUNPLUS-LED]  99.06,37.85 0 top
LG46  LED-G  [SUNPLUS-LED]  114.3,37.85 0 top
LG47  LED-G  [SUNPLUS-LED]  129.54,37.85 0 top
LG48  LED-G  [SUNPLUS-LED]  144.78,37.85 0 top
LG49  LED-G  [SUNPLUS-LED]  38.1,22.61 180 top
LG50  LED-G  [SUNPLUS-LED]  53.34,22.61 180 top
LG51  LED-G  [SUNPLUS-LED]  68.58,22.61 180 top
LG52  LED-G  [SUNPLUS-LED]  83.82,22.61 180 top
LG53  LED-G  [SUNPLUS-LED]  99.06,22.61 180 top
LG54  LED-G  [SUNPLUS-LED]  114.3,22.61 180 top
LG55  LED-G  [SUNPLUS-LED]  129.54,22.61 180 top
LG56  LED-G  [SUNPLUS-LED]  144.78,22.61 180 top
LG57  LED-G  [SUNPLUS-LED]  38.1,7.37 0 top
LG58  LED-G  [SUNPLUS-LED]  53.34,7.37 0 top
LG59  LED-G  [SUNPLUS-LED]  68.58,7.37 0 top
LG60  LED-G  [SUNPLUS-LED]  83.82,7.37 0 top
LG61  LED-G  [SUNPLUS-LED]  99.06,7.37 0 top
LG62  LED-G  [SUNPLUS-LED]  114.3,7.37 0 top
LG63  LED-G  [SUNPLUS-LED]  129.54,7.37 0 top
LG64  LED-G  [SUNPLUS-LED]  144.78,7.37 0 top
LR1  LED-R  [SUNPLUS-LED]  38.1,111.51 180 top
LR2  LED-R  [SUNPLUS-LED]  53.34,111.51 180 top
LR3  LED-R  [SUNPLUS-LED]  68.58,111.51 180 top
LR4  LED-R  [SUNPLUS-LED]  83.82,111.51 180 top
LR5  LED-R  [SUNPLUS-LED]  99.06,111.51 180 top
LR6  LED-R  [SUNPLUS-LED]  114.3,111.51 180 top
LR7  LED-R  [SUNPLUS-LED]  129.54,111.51 180 top
LR8  LED-R  [SUNPLUS-LED]  144.78,111.51 180 top
LR9  LED-R  [SUNPLUS-LED]  38.1,96.27 0 top
LR10  LED-R  [SUNPLUS-LED]  53.34,96.27 0 top
LR11  LED-R  [SUNPLUS-LED]  68.58,96.27 0 top
LR12  LED-R  [SUNPLUS-LED]  83.82,96.27 0 top
LR13  LED-R  [SUNPLUS-LED]  99.06,96.27 0 top
LR14  LED-R  [SUNPLUS-LED]  114.3,96.27 0 top
LR15  LED-R  [SUNPLUS-LED]  129.54,96.27 0 top
LR16  LED-R  [SUNPLUS-LED]  144.78,96.27 0 top
LR17  LED-R  [SUNPLUS-LED]  38.1,81.03 180 top
LR18  LED-R  [SUNPLUS-LED]  53.34,81.03 180 top
LR19  LED-R  [SUNPLUS-LED]  68.58,81.03 180 top
LR20  LED-R  [SUNPLUS-LED]  83.82,81.03 180 top
LR21  LED-R  [SUNPLUS-LED]  99.06,81.03 180 top
LR22  LED-R  [SUNPLUS-LED]  114.3,81.03 180 top
LR23  LED-R  [SUNPLUS-LED]  129.54,81.03 180 top
LR24  LED-R  [SUNPLUS-LED]  144.78,81.03 180 top
LR25  LED-R  [SUNPLUS-LED]  38.1,65.79 0 top
LR26  LED-R  [SUNPLUS-LED]  53.34,65.79 0 top
LR27  LED-R  [SUNPLUS-LED]  68.58,65.79 0 top
LR28  LED-R  [SUNPLUS-LED]  83.82,65.79 0 top
LR29  LED-R  [SUNPLUS-LED]  99.06,65.79 0 top
LR30  LED-R  [SUNPLUS-LED]  114.3,65.79 0 top
LR31  LED-R  [SUNPLUS-LED]  129.54,65.79 0 top
LR32  LED-R  [SUNPLUS-LED]  144.78,65.79 0 top
LR33  LED-R  [SUNPLUS-LED]  38.1,50.55 180 top
LR34  LED-R  [SUNPLUS-LED]  53.34,50.55 180 top
LR35  LED-R  [SUNPLUS-LED]  68.58,50.55 180 top
LR36  LED-R  [SUNPLUS-LED]  83.82,50.55 180 top
LR37  LED-R  [SUNPLUS-LED]  99.06,50.55 180 top
LR38  LED-R  [SUNPLUS-LED]  114.3,50.55 180 top
LR39  LED-R  [SUNPLUS-LED]  129.54,50.55 180 top
LR40  LED-R  [SUNPLUS-LED]  144.78,50.55 180 top
LR41  LED-R  [SUNPLUS-LED]  38.1,35.31 0 top
LR42  LED-R  [SUNPLUS-LED]  53.34,35.31 0 top
LR43  LED-R  [SUNPLUS-LED]  68.58,35.31 0 top
LR44  LED-R  [SUNPLUS-LED]  83.82,35.31 0 top
LR45  LED-R  [SUNPLUS-LED]  99.06,35.31 0 top
LR46  LED-R  [SUNPLUS-LED]  114.3,35.31 0 top
LR47  LED-R  [SUNPLUS-LED]  129.54,35.31 0 top
LR48  LED-R  [SUNPLUS-LED]  144.78,35.31 0 top
LR49  LED-R  [SUNPLUS-LED]  38.1,20.07 180 top
LR50  LED-R  [SUNPLUS-LED]  53.34,20.07 180 top
LR51  LED-R  [SUNPLUS-LED]  68.58,20.07 180 top
LR52  LED-R  [SUNPLUS-LED]  83.82,20.07 180 top
LR53  LED-R  [SUNPLUS-LED]  99.06,20.07 180 top
LR54  LED-R  [SUNPLUS-LED]  114.3,20.07 180 top
LR55  LED-R  [SUNPLUS-LED]  129.54,20.07 180 top
LR56  LED-R  [SUNPLUS-LED]  144.78,20.07 180 top
LR57  LED-R  [SUNPLUS-LED]  38.1,4.83 0 top
LR58  LED-R  [SUNPLUS-LED]  53.34,4.83 0 top
LR59  LED-R  [SUNPLUS-LED]  68.58,4.83 0 top
LR60  LED-R  [SUNPLUS-LED]  83.82,4.83 0 top
LR61  LED-R  [SUNPLUS-LED]  99.06,4.83 0 top
LR62  LED-R  [SUNPLUS-LED]  114.3,4.83 0 top
LR63  LED-R  [SUNPLUS-LED]  129.54,4.83 0 top
LR64  LED-R  [SUNPLUS-LED]  144.78,4.83 0 top
M1A  SSM-114-S-SV  [SAMTEC_SSM-114-S-SV]  3.17,150.75 270 top
M1B  SSM-114-S-SV  [SAMTEC_SSM-114-S-SV]  18.41,150.75 270 top
PS1  [DC-DC-TDN-5W]  12.6,125.4 270 top
Q1  NPN_DUALLFPAK56_BIGHS  [LFPAK56_HS2]  84.58,139.95 180 top
Q2  NPN_DUALLFPAK56_BIGHS  [LFPAK56_HS2]  52.32,139.7 180 top
Q3  NPN_DUALLFPAK56_BIGHS  [LFPAK56_HS2]  119,139.57 180 top
Q4  NPN_DUALLFPAK56_BIGHS  [LFPAK56_HS2]  67.94,139.45 180 top
Q5  NPN_DUALLFPAK56_BIGHS  [LFPAK56_HS2]  130.56,139.45 180 top
Q6  NPN_DUALLFPAK56_BIGHS  [LFPAK56_HS2]  147.19,139.45 180 top
Q7  NPN_DUALLFPAK56_BIGHS  [LFPAK56_HS2]  12.32,113.16 270 top
Q8  NPN_DUALLFPAK56_BIGHS  [LFPAK56_HS2]  12.19,98.17 270 top
Q9  NPN_DUALLFPAK56_BIGHS  [LFPAK56_HS2]  12.06,84.07 270 top
Q10  NPN_DUALLFPAK56_BIGHS  [LFPAK56_HS2]  12.19,55.5 270 top
Q11  NPN_DUALLFPAK56_BIGHS  [LFPAK56_HS2]  12.06,37.21 270 top
Q12  NPN_DUALLFPAK56_BIGHS  [LFPAK56_HS2]  12.06,23.11 270 top
R1  4R99  [1812]  113.67,148.21 0 top
R2  4R99  [1812]  119.38,148.21 0 top
R3  4R99  [1812]  48.77,148.08 0 top
R4  4R99  [1812]  54.61,148.08 0 top
R5  4R99  [1812]  65.15,148.08 0 top
R6  4R99  [1812]  70.74,148.08 0 top
R7  4R99  [1812]  79.76,148.08 0 top
R8  4R99  [1812]  85.72,148.08 0 top
R9  4R99  [1812]  127.76,148.08 0 top
R10  4R99  [1812]  133.22,148.08 0 top
R11  4R99  [1812]  143.33,148.08 0 top
R12  4R99  [1812]  149.1,148.08 0 top
R13  49K9  [1206S]  72.69,143.36 270 top
R14  49K9  [1206S]  136.93,142.16 270 top
R15  49K9  [1206S]  40.44,141.5 180 top
R16  49K9  [1206S]  58.14,140.77 90 top
R17  332  [0805S]  23.11,135.31 180 top
R18  332  [0805S]  27.1,135.23 180 top
R19  4.99K  [0805S]  102.23,134.19 270 top
R20  49K9  [1206S]  111.23,134.09 270 top
R21  49K9  [1206S]  121.56,134.09 180 top
R22  332  [0805S]  25.2,132.77 180 top
R23  1R00  [1206S]  100.1,130.23 180 top
R24  4.99K  [0805S]  89.2,130.18 0 top
R25  4R99  [0805S]  120.04,127.23 90 top
R26  1R00  [1206S]  86.03,126.64 180 top
R27  4R99  [0805S]  58.52,125.48 0 top
R28  10R0  [1206S]  92.98,124.86 180 top
R29  100  [0805S]  24.89,115.9 90 top
R30  4R99  [1812]  3.81,113.28 90 top
R31  332  [0805S]  18.85,113.11 90 top
R32  4R99  [1812]  3.68,107.57 90 top
R33  10R0  [1206S]  94.56,107.04 180 top
R34  49K9  [1206S]  9.96,103.48 0 top
R35  4R99  [1812]  3.81,100.08 90 top
R36  4R99  [1812]  3.81,94.23 90 top
R37  49K9  [1206S]  9.4,91.54 0 top
R38  10R0  [1206S]  94.08,91.14 180 top
R39  4R99  [0805S]  24.43,89.81 180 top
R40  4R99  [1812]  3.81,87 90 top
R41  10R0  [1206S]  26.08,82.03 180 top
R42  4R99  [1812]  3.68,80.52 90 top
R43  10R0  [1206S]  26.08,79.56 180 top
R44  10R0  [1206S]  26.01,77.07 180 top
R45  10R0  [1206S]  95.89,76.17 180 top
R46  10R0  [1206S]  25.99,73.63 180 top
R47  49K9  [1206S]  9.42,73.25 0 top
R48  4.99K  [0805S]  14.86,64.31 90 top
R49  1R00  [1206S]  18.75,64.31 270 top
R50  4R99  [1812]  3.81,57.28 90 top
R51  4R99  [1812]  3.81,51.82 90 top
R52  10R0  [1206S]  97.09,46.49 0 top
R53  10R0  [1206S]  101.78,45.42 90 top
R54  49K9  [1206S]  9.98,45.14 180 top
R55  4R99  [1812]  3.94,40.64 90 top
R56  4R99  [1812]  3.94,34.16 90 top
R57  10R0  [1206S]  27.45,33.49 180 top
R58  49K9  [1206S]  8.97,31.04 0 top
R59  10R0  [1206S]  27.45,30.94 180 top
R60  10R0  [1206S]  98.93,30.22 90 top
R61  10R0  [1206S]  96.1,30.17 90 top
R62  10R0  [1206S]  27.49,28.51 180 top
R63  10R0  [1206S]  27.52,26.06 180 top
R64  4R99  [1812]  3.94,25.02 90 top
R65  4R99  [1812]  3.94,18.41 90 top
R66  4R99  [0805S]  20.32,16.69 90 top
R67  49K9  [1206S]  10.85,11.91 0 top
R68  4.99K  [0805S]  12.85,3.56 90 top
R69  1R00  [1206S]  15.98,3.4 270 top
SH1  JUMPER  [JUMPER]  38.86,138.81 180 top
SH2  JUMPER  [JUMPER]  31.45,135.64 270 top
U1  OPA237  [SOT23-5]  44.2,142.62 180 top
U2  74AUC1G17DBV  [SOT23-5']  11.35,142.47 0 top
U3  OPA237  [SOT23-5]  76.58,141.78 180 top
U4  OPA237  [SOT23-5]  140.11,141.27 180 top
U5  OPA237  [SOT23-5]  112.65,141.1 180 top
U6  OPA237  [SOT23-5]  60.96,140.72 180 top
U7  OPA237  [SOT23-5]  125.12,138.28 180 top
U8  741G3157DBVR  [DBV_R-PDSO-G6]  9.83,136.02 180 top
U9  AP8802  [SOIC8-EP]  93.78,134.75 0 top
U10  AD5624R-3  [MSOP10]  121.74,130.81 90 top
U11  AD5624R-3  [MSOP10]  59.82,129.92 270 top
U12  AP8802  [SOIC8-EP]  106.43,128.6 270 top
U13  LM26  [SOT23-5'']  28.47,122.25 0 top
U14  OPA237  [SOT23-5]  9.47,106.5 270 top
U15  OPA237  [SOT23-5]  15.62,92.46 270 top
U16  AD5624R-3  [MSOP10]  20.95,81.41 0 top
U17  OPA237  [SOT23-5]  9.14,76.33 270 top
U18  AP8802  [SOIC8-EP]  17.53,69.65 90 top
U19  OPA237  [SOT23-5]  10.49,48.34 270 top
U20  AD5624R-3  [MSOP10]  21.72,42.67 0 top
U21  OPA237  [SOT23-5]  15.24,31.5 270 top
U22  ADUM1100  [SOIC8]  24.33,18.39 0 top
U23  OPA237  [SOT23-5]  9.78,14.99 270 top
U24  AP8802  [SOIC8-EP]  16,8.56 90 top
V1  HS  [SUNPLUS-VIAS-ONLY]  38.1,114.05 0 top
V2  HS  [SUNPLUS-VIAS-ONLY]  53.34,114.05 0 top
V3  HS  [SUNPLUS-VIAS-ONLY]  68.58,114.05 0 top
V4  HS  [SUNPLUS-TOP-VIAS-ONLY]  83.82,114.05 0 top
V5  SUNPLUS-VIAS-ONLY  [SUNPLUS-VIAS-ONLY]  99.06,114.05 0 top
V6  SUNPLUS-VIAS-ONLY  [SUNPLUS-VIAS-ONLY]  114.3,114.05 0 top
V7  SUNPLUS-VIAS-ONLY  [SUNPLUS-VIAS-ONLY]  129.54,114.05 0 top
V8  SUNPLUS-VIAS-ONLYTOPVIAS  [SUNPLUS-TOP-VIAS-ONLY]  144.78,114.05 0 top
V9  SUNPLUS-VIAS-ONLY  [SUNPLUS-VIAS-ONLY]  38.1,98.81 180 top
V10  HS  [SUNPLUS-VIAS-ONLY]  53.34,98.81 0 top
V11  HS  [SUNPLUS-VIAS-ONLY]  68.58,98.81 180 top
V12  HS  [SUNPLUS-TOP-VIAS-ONLY]  83.82,98.81 180 top
V13  SUNPLUS-VIAS-ONLY  [SUNPLUS-VIAS-ONLY]  99.06,98.81 180 top
V14  SUNPLUS-VIAS-ONLY  [SUNPLUS-VIAS-ONLY]  114.3,98.81 0 top
V15  SUNPLUS-VIAS-ONLY  [SUNPLUS-VIAS-ONLY]  129.54,98.81 180 top
V16  SUNPLUS-VIAS-ONLYTOPVIAS  [SUNPLUS-TOP-VIAS-ONLY]  144.78,98.81 180 top
V17  SUNPLUS-VIAS-ONLY  [SUNPLUS-VIAS-ONLY]  38.1,83.57 0 top
V18  SUNPLUS-VIAS-ONLY  [SUNPLUS-VIAS-ONLY]  53.34,83.57 0 top
V19  SUNPLUS-VIAS-ONLY  [SUNPLUS-VIAS-ONLY]  68.58,83.57 0 top
V20  SUNPLUS-VIAS-ONLYTOPVIAS  [SUNPLUS-TOP-VIAS-ONLY]  83.82,83.57 0 top
V21  SUNPLUS-VIAS-ONLY  [SUNPLUS-VIAS-ONLY]  99.06,83.57 0 top
V22  SUNPLUS-VIAS-ONLY  [SUNPLUS-VIAS-ONLY]  114.3,83.57 0 top
V23  SUNPLUS-VIAS-ONLY  [SUNPLUS-VIAS-ONLY]  129.54,83.57 0 top
V24  SUNPLUS-VIAS-ONLYTOPVIAS  [SUNPLUS-TOP-VIAS-ONLY]  144.78,83.57 0 top
V25  SUNPLUS-VIAS-ONLY  [SUNPLUS-VIAS-ONLY]  38.1,68.33 0 top
V26  SUNPLUS-VIAS-ONLY  [SUNPLUS-VIAS-ONLY]  53.34,68.33 0 top
V27  SUNPLUS-VIAS-ONLY  [SUNPLUS-VIAS-ONLY]  68.58,68.33 0 top
V28  SUNPLUS-VIAS-ONLYTOPVIAS  [SUNPLUS-TOP-VIAS-ONLY]  83.82,68.33 180 top
V29  SUNPLUS-VIAS-ONLY  [SUNPLUS-VIAS-ONLY]  99.06,68.33 0 top
V30  SUNPLUS-VIAS-ONLY  [SUNPLUS-VIAS-ONLY]  114.3,68.33 0 top
V31  SUNPLUS-VIAS-ONLY  [SUNPLUS-VIAS-ONLY]  129.54,68.33 0 top
V32  SUNPLUS-VIAS-ONLYTOPVIAS  [SUNPLUS-TOP-VIAS-ONLY]  144.78,68.33 180 top
V33  SUNPLUS-VIAS-ONLY  [SUNPLUS-VIAS-ONLY]  38.1,53.09 0 top
V34  SUNPLUS-VIAS-ONLY  [SUNPLUS-VIAS-ONLY]  53.34,53.09 0 top
V35  SUNPLUS-VIAS-ONLY  [SUNPLUS-VIAS-ONLY]  68.58,53.09 0 top
V36  SUNPLUS-VIAS-ONLYTOPVIAS  [SUNPLUS-TOP-VIAS-ONLY]  83.82,53.09 0 top
V37  SUNPLUS-VIAS-ONLY  [SUNPLUS-VIAS-ONLY]  99.06,53.09 0 top
V38  SUNPLUS-VIAS-ONLY  [SUNPLUS-VIAS-ONLY]  114.3,53.09 0 top
V39  SUNPLUS-VIAS-ONLY  [SUNPLUS-VIAS-ONLY]  129.54,53.09 0 top
V40  SUNPLUS-VIAS-ONLYTOPVIAS  [SUNPLUS-TOP-VIAS-ONLY]  144.78,53.09 0 top
V41  SUNPLUS-VIAS-ONLY  [SUNPLUS-VIAS-ONLY]  38.1,37.85 180 top
V42  SUNPLUS-VIAS-ONLY  [SUNPLUS-VIAS-ONLY]  53.34,37.85 0 top
V43  SUNPLUS-VIAS-ONLY  [SUNPLUS-VIAS-ONLY]  68.58,37.85 180 top
V44  SUNPLUS-VIAS-ONLYTOPVIAS  [SUNPLUS-TOP-VIAS-ONLY]  83.82,37.85 180 top
V45  SUNPLUS-VIAS-ONLY  [SUNPLUS-VIAS-ONLY]  99.06,37.85 180 top
V46  SUNPLUS-VIAS-ONLY  [SUNPLUS-VIAS-ONLY]  114.3,37.85 0 top
V47  SUNPLUS-VIAS-ONLY  [SUNPLUS-VIAS-ONLY]  129.54,37.85 180 top
V48  SUNPLUS-VIAS-ONLYTOPVIAS  [SUNPLUS-TOP-VIAS-ONLY]  144.78,37.85 180 top
V49  SUNPLUS-VIAS-ONLY  [SUNPLUS-VIAS-ONLY]  38.1,22.61 0 top
V50  SUNPLUS-VIAS-ONLY  [SUNPLUS-VIAS-ONLY]  53.34,22.61 0 top
V51  SUNPLUS-VIAS-ONLY  [SUNPLUS-VIAS-ONLY]  68.58,22.61 0 top
V52  SUNPLUS-VIAS-ONLYTOPVIAS  [SUNPLUS-TOP-VIAS-ONLY]  83.82,22.61 0 top
V53  SUNPLUS-VIAS-ONLY  [SUNPLUS-VIAS-ONLY]  99.06,22.61 0 top
V54  SUNPLUS-VIAS-ONLY  [SUNPLUS-VIAS-ONLY]  114.3,22.61 0 top
V55  SUNPLUS-VIAS-ONLY  [SUNPLUS-VIAS-ONLY]  129.54,22.61 0 top
V56  SUNPLUS-VIAS-ONLYTOPVIAS  [SUNPLUS-TOP-VIAS-ONLY]  144.78,22.61 0 top
V57  SUNPLUS-VIAS-ONLY  [SUNPLUS-VIAS-ONLY]  38.1,7.37 0 top
V58  SUNPLUS-VIAS-ONLY  [SUNPLUS-VIAS-ONLY]  53.34,7.37 0 top
V59  SUNPLUS-VIAS-ONLY  [SUNPLUS-VIAS-ONLY]  68.58,7.37 0 top
V60  SUNPLUS-VIAS-ONLYTOPVIAS  [SUNPLUS-TOP-VIAS-ONLY]  83.82,7.37 180 top
V61  SUNPLUS-VIAS-ONLY  [SUNPLUS-VIAS-ONLY]  99.06,7.37 0 top
V62  SUNPLUS-VIAS-ONLY  [SUNPLUS-VIAS-ONLY]  114.3,7.37 0 top
V63  SUNPLUS-VIAS-ONLY  [SUNPLUS-VIAS-ONLY]  129.54,7.37 0 top
V64  SUNPLUS-VIAS-ONLYTOPVIAS  [SUNPLUS-TOP-VIAS-ONLY]  144.78,7.37 180 top

## Library data of the parts
C1-C19 C22-C42 C44-C55 D1-D5 IR1-IR256 J1 J3-J6 L1-L4 LB1-LB64 LG1-LG64 LR1-LR64 PS1 Q1-Q12 R1-R69 SH1 SH2 U9-U13 U16 U18 U20 U22 U24 V1-V64 = STEVES_BU
C20 C21 C43 FID1-FID4 = adafruit
J2 = con-coax; OC_FARNELL: unknown; OC_NEWARK: unknown
M1A M1B = SAMTEC-FLE-Mxx-Sxx_By_element14_Batch_1; MPN: SSM-114-S-SV; OC_FARNELL: -; OC_NEWARK: 11P7941; PACKAGE: .025 SOCKET STRIPS , 14POS; SUPPLIER: SAMTEC
U1 U3-U7 U14 U15 U17 U19 U21 U23 = analog-devices; MF: ALTERA CORPORATION; MPN: AD8065ARTZ-REEL7; OC_FARNELL: 1464845; OC_NEWARK: 59K6316
U2 = 74xx-little-de
U8 = 74xx-little-us